# Altium PCB OPG_v8_pcb.PcbDoc (part 1 of 3)
Units mm, origin at the board's own origin, x right, y up, seen from the top; angles counter-clockwise.
Board outline 65 x 95 mm, 2 copper layers (Top Layer, Bottom Layer), stack 0.081 mm thick; 16 components, 17 nets, 129 pads, 66 vias.
Unrouted connection lines stored in the file: 30.
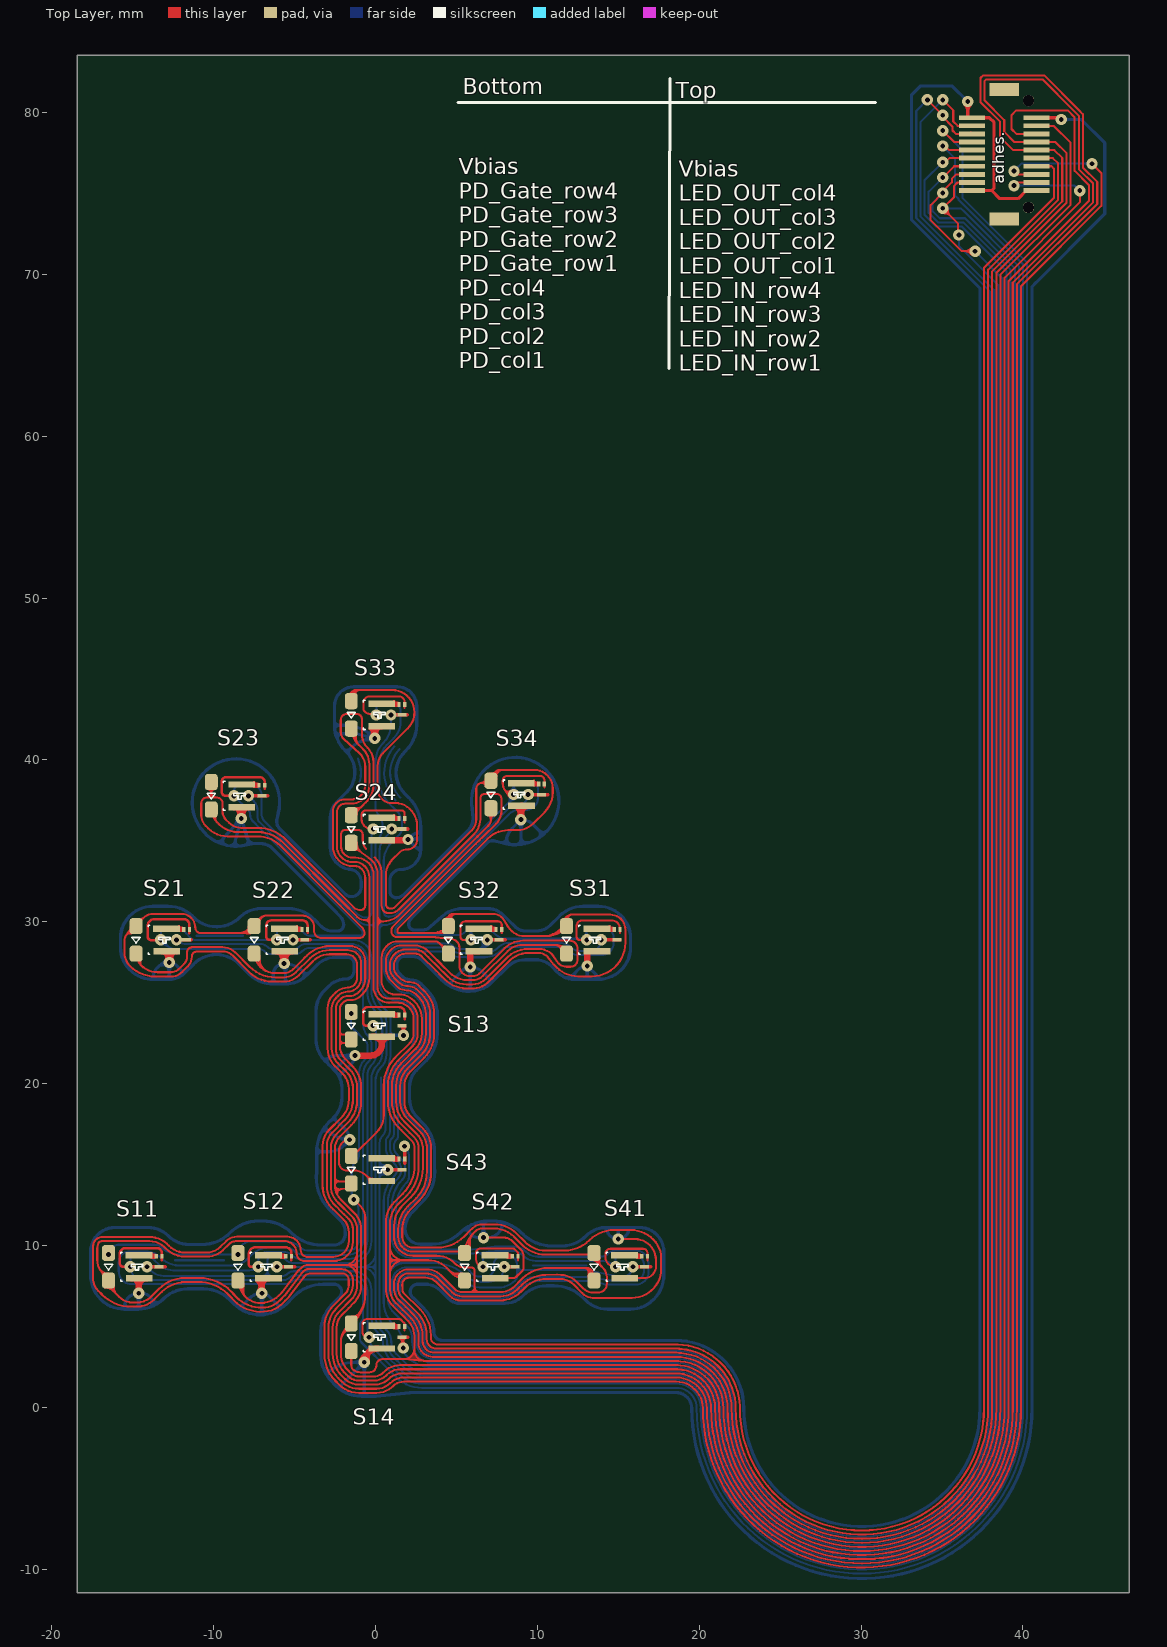
[diagram p0: Top Layer view]
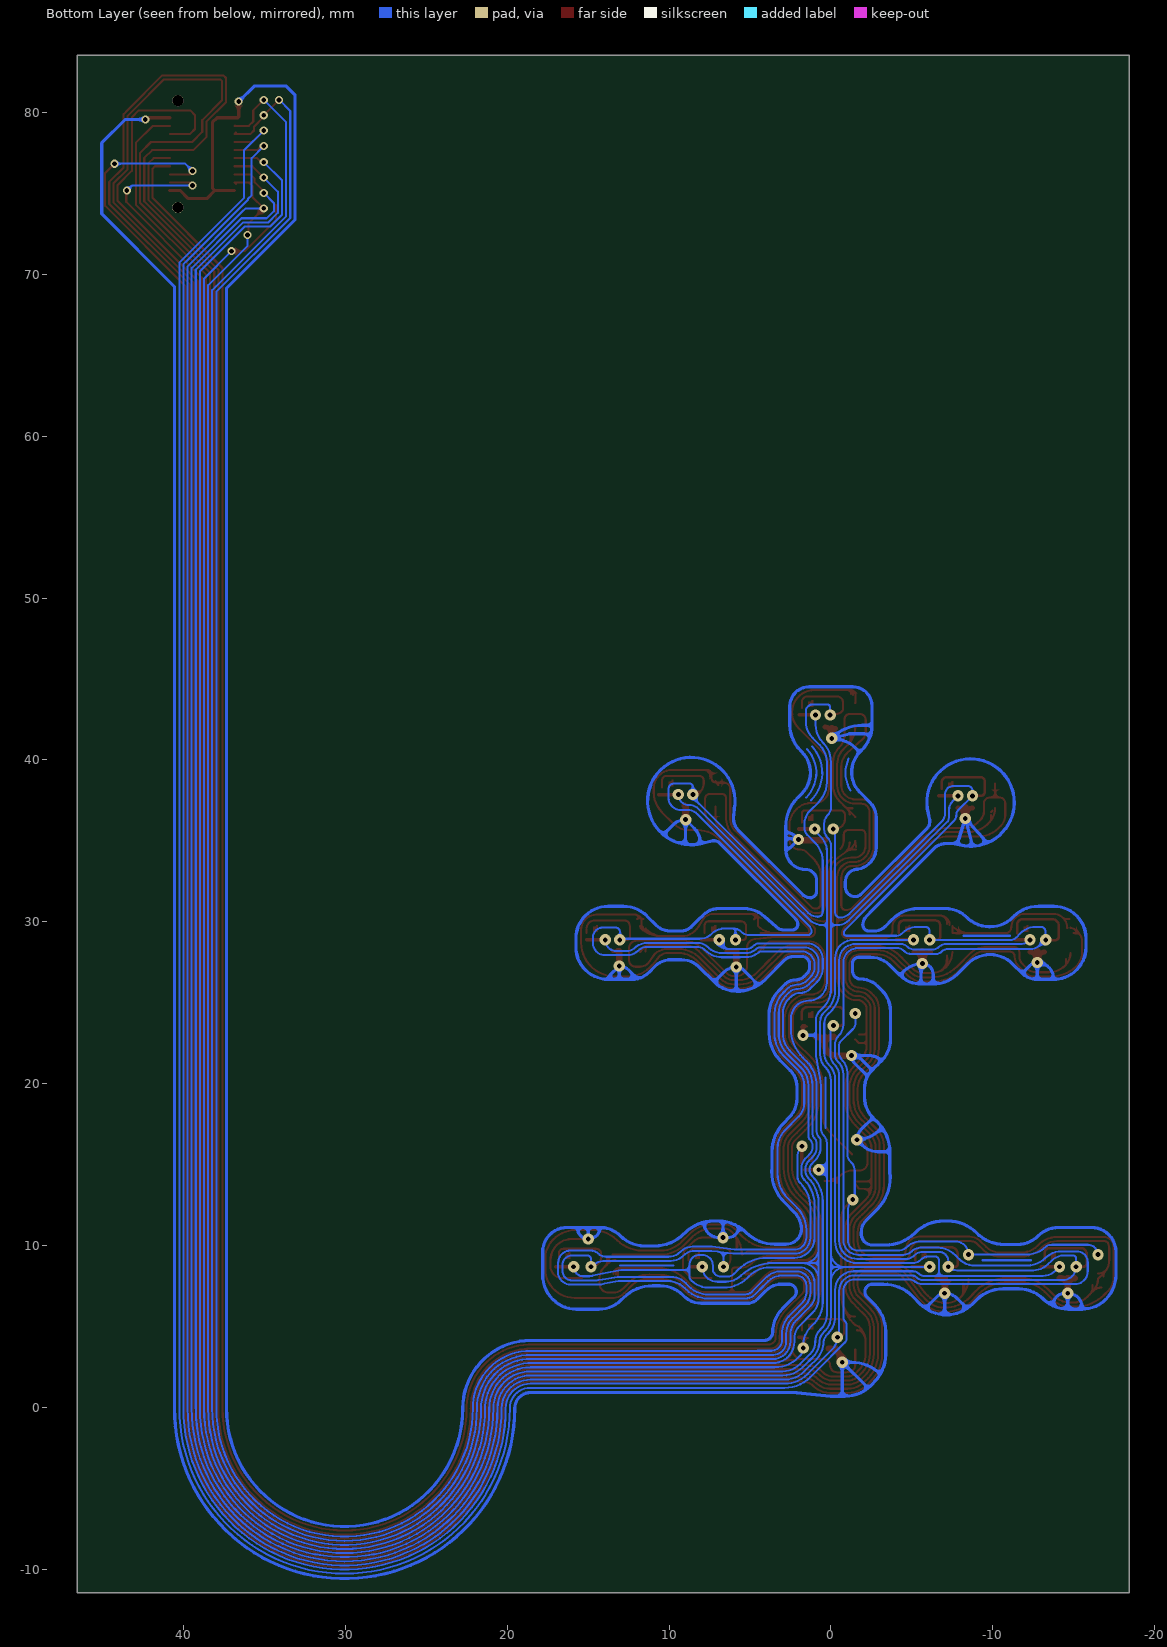
[diagram p1: Bottom Layer view, seen from below]
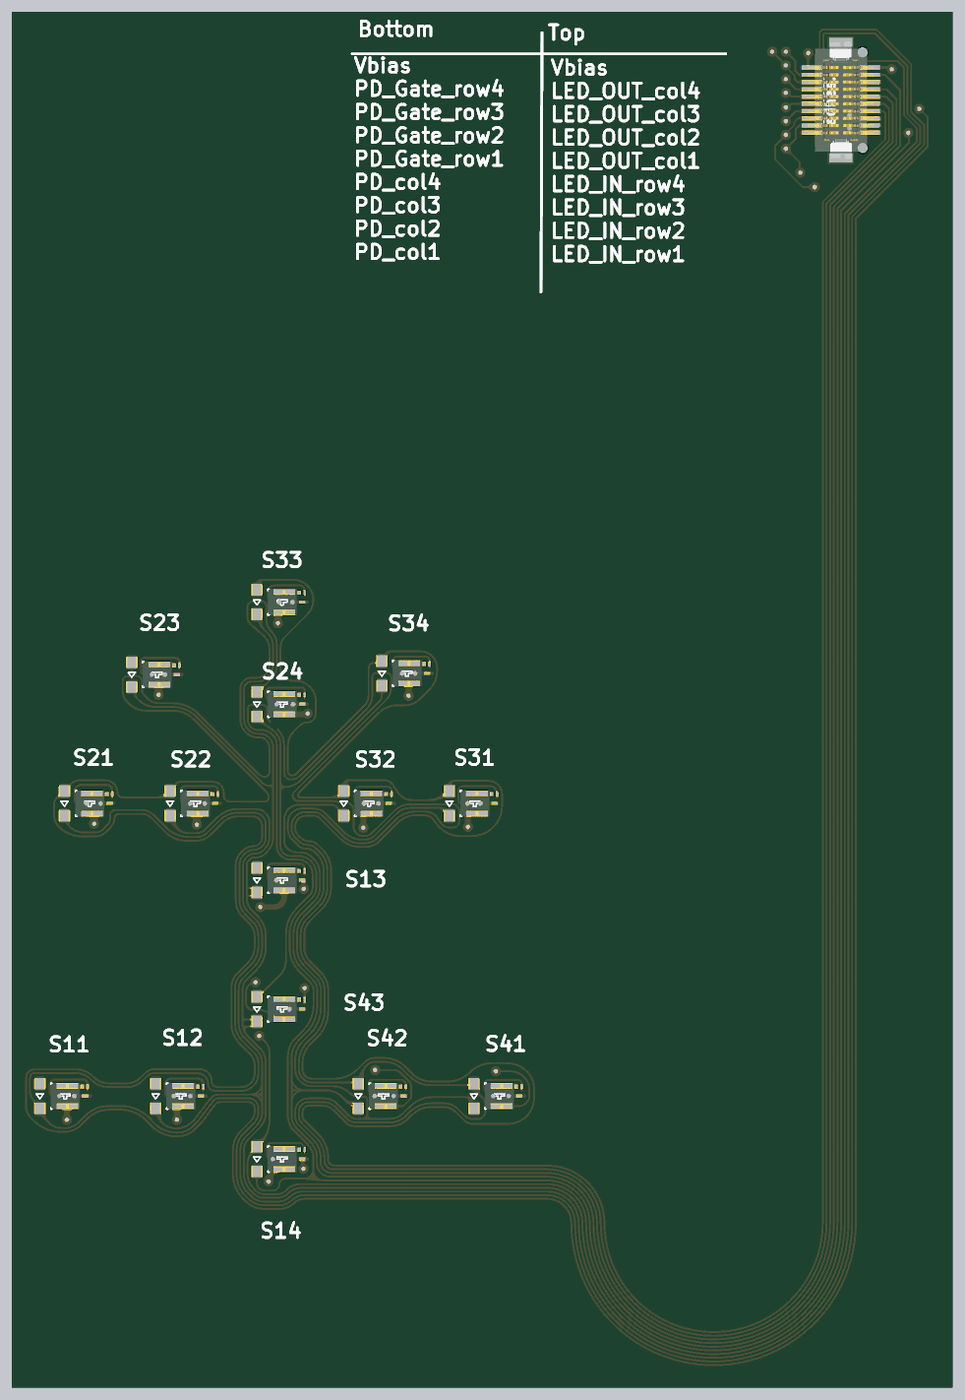
[diagram p4: 3D render of the assembled board from above, using the file's embedded part models]

## Layer stack, top to bottom
Top Solder: solder mask 0.013, Solder Resist, Dk 3.5
Top Layer: signal copper 0.028
Dielectric 1: core 0.025, Core-043, Dk 4.3
Bottom Layer: signal copper 0.028
Bottom Solder: solder mask 0.013, Solder Resist, Dk 3.5

## Board outline
-18.43,-11.46 -18.43,83.54 46.57,83.54 46.57,-11.46

## Design rules (kind name [scope] priority, off if disabled: settings)
Clearance "Aisler Clearance" [All] p1: gap=0.15 ignorepadtopadclearanceinfootprint=FALSE except(0: Arc-Hole Track-Hole SMDPad-Hole THPad-Hole Via-Hole Fill-Hole Poly-Hole Region-Hole Text-Hole; 0.1: Via-Via; 0.127: Arc-Arc Arc-Track Track-Track; 0.2: Arc-Text Track-Text SMDPad-THPad SMDPad-Text THPad-THPad THPad-Via THPad-Text Text-Text) // Aisler PCB constraints
Clearance [All] p2: gap=0.2 ignorepadtopadclearanceinfootprint=FALSE except(0: Arc-Hole Track-Hole SMDPad-Hole THPad-Hole Via-Hole Fill-Hole Poly-Hole Region-Hole Text-Hole; 0.1: SMDPad-SMDPad; 1: Arc-Fill Arc-Poly Arc-Region Track-Fill Track-Poly Track-Region SMDPad-Fill SMDPad-Poly SMDPad-Region THPad-Fill THPad-Poly THPad-Region Via-Fill Via-Poly Via-Region Fill-Fill Fill-Poly Fill-Region Poly-Poly Poly-Region Region-Region)
MinimumSolderMaskSliver [All] p1: minsoldermaskwidth=0.1
NetAntennae [All] p1: netantennaetolerance=0.3
PolygonConnect [All] p1: connectstyle=Relief reliefconductorwidth=0.254 reliefentries=4 polygonreliefangle="90 Angle" airgapwidth=0.254
RoutingVias [All] p1: holewidth=1.5 width=2.5 viastyle="Through Hole" minholewidth=0.2 minwidth=0.4 maxholewidth=2 maxwidth=3
SilkToSolderMaskClearance [IsPad] p1: minsilkscreentomaskgap=0.2 clearancetoexposedcopper=TRUE
SolderMaskExpansion [All] p1: expansion=0.102 istentingtop=FALSE
Width "Aisler Width" [All] p1: maxlimit=1 minlimit=0.127 preferedwidth=0.152 minimp=50.000000 maximp=50.000000 favimp=50.000000 // Aisler PCB Constraints
Width [All] p2: maxlimit=1 minlimit=0.1 preferedwidth=0.5 minimp=50.000000 maximp=50.000000 favimp=50.000000
27 further rules are at their usual default settings.

## Components (designator, comment, footprint, x,y, rotation, side; value= is the part's Value field where it differs from the comment)
OPT11 "OPG_Sensor_v3" OPG_SENSOR_3 -15,8.68 r0 top
OPT12 "OPG_Sensor_v3" OPG_SENSOR_3 -7,8.68 r0 top
OPT13 "OPG_Sensor_v3" OPG_SENSOR_3 0,23.58 r0 top
OPT14 "OPG_Sensor_v3" OPG_SENSOR_3 0,4.33 r0 top
OPT21 "OPG_Sensor_v3" OPG_SENSOR_3 -13.3,28.88 r0 top
OPT22 "OPG_Sensor_v3" OPG_SENSOR_3 -6,28.88 r0 top
OPT23 "OPG_Sensor_v3" OPG_SENSOR_3 -8.65,37.78 r0 top
OPT24 "OPG_Sensor_v3" OPG_SENSOR_3 0,35.73 r0 top
OPT31 "OPG_Sensor_v3" OPG_SENSOR_3 13.3,28.88 r0 top
OPT32 "OPG_Sensor_v3" OPG_SENSOR_3 6,28.88 r0 top
OPT33 "OPG_Sensor_v3" OPG_SENSOR_3 0,42.78 r0 top
OPT34 "OPG_Sensor_v3" OPG_SENSOR_3 8.63,37.86 r0 top
OPT41 "OPG_Sensor_v3" OPG_SENSOR_3 15,8.68 r0 top
OPT42 "OPG_Sensor_v3" OPG_SENSOR_3 7,8.68 r0 top
OPT43 "OPG_Sensor_v3" OPG_SENSOR_3 0,14.68 r0 top
P1 "AMPHENOL_10132797-021100LF_Bergstak_plug" AMPHENOL_10132797-021100LF_Bergstak_plug 38.85,77.434 r270 top

## Footprints (in the part's own frame and the unit in brackets; to place one, negate y for a bottom-side part, rotate by r counter-clockwise, add the part's x,y. Pads: shape width x height; smd on the part's side, far side on the other; paste and mask are expansions set on the pad)
AMPHENOL_10132797-021100LF_Bergstak_plug [mm] "plug/male, 0.5 mm pitch, 20 pin, 3 mm mated height"
  rect 0.8x1.8 smd paste-0.1 mask-0.1: 0(-4,0) 0(4,0)
  round 0.7 hole 0.7 unplated: 0(-3.3,1.5) 0(3.3,1.5)
  rect 0.3x1.6 smd paste-0.1 mask-0.1: 1(-2.25,-2) 2(-1.75,-2) 3(-1.25,-2) 4(-0.75,-2) 5(-0.25,-2) 6(0.25,-2) 7(0.75,-2) 8(1.25,-2) 9(1.75,-2) 10(2.25,-2) 11(2.25,2) 12(1.75,2) 13(1.25,2) 14(0.75,2) 15(0.25,2) 16(-0.25,2) 17(-0.75,2) 18(-1.25,2) 19(-1.75,2) 20(-2.25,2)
  body extent -4.05,-2.3 4.05,2.3, height 2.7
OPG_SENSOR_3 [mm]
  rect 1.65x0.4 smd paste-0.3 mask-0.1: A(0.39,-0.7) S(0.38,0.7)
  rect 0.55x0.22 smd paste-0.05 mask-0.05: D(1.625,0)
  rect 0.2x0.3 smd paste-0.025 mask+0.05: G(1.8,0.65) S(1.45,0.65)
  rrect50% 0.8x1 smd paste-0.1 mask-0.1: S1(-1.5,0.85) S2(-1.5,-0.85)
  Top Layer region: 1.4,0.8 1.3,0.8 1.262,0.808 1.229,0.829 1.208,0.862 1.2,0.9 1.2,0.9 1.1,0.9 1.1,0.5 1.4,0.5
  silkscreen extent -1.75,-0.9 0.6,0.9, body extent -1.9,-0.9 1.93,0.9, height 0.6

## Part data
P1: "20 pin, 0.5 mm pitch, 3 mm mated height, plug/male"

## Via types
v1: diameter 0.7, hole 0.3, Top Layer to Bottom Layer, 49 vias
v2: diameter 0.7/0.5 (per signal layer), hole 0.3, Top Layer to Bottom Layer, 17 vias

## Nets (pads, with @x,y where several pads share a name; then routed paths per layer and width w, separated by ;. In a path a pad name is that pad's centre, name@x,y a point inside that pad or via, vN(x,y) a via of type N, cw(c..) or ccw(c..) an arc to the next point about the centre after c; other vN are vias at no path point)
LED_IN_row1: OPT11.S1 OPT12.S1 OPT13.S1 OPT14.S1 P1.12 | length 182
  Top Layer w0.127: -2.146,4.031 -2.146,3.309 ccw(c-0.743,3.309) -1.735,2.317 -1.53,2.111 ccw(c-1.034,2.607) -1.034,1.906 -0.091,1.906 ccw(c-0.091,2.719) -0.01,1.91 ccw(c-0.091,2.719) 0.484,2.144 ; -1.931,4.64 cw(c-1.646,4.354) -1.888,4.678 ; OPT14.S1@-1.788,4.777 -1.872,4.694 ccw(c-1.209,4.032) -1.888,4.678 ; OPT14.S1@-1.596,4.758 -1.646,4.758 ccw(c-1.646,4.354) -1.888,4.678 ; OPT14.S1@-1.483,5.608 -1.479,5.608 ccw(c-1.479,6.299) -1.045,5.761 ; v1(-1.343,12.83) -0.921,12.408 cw(c-1.613,11.717) -0.635,11.717 -0.635,6.997 ; OPT14.S1@-1.211,5.572 ccw(c-2.602,6.963) -1.045,5.761 ; -0.99,5.81 cw(c-1.479,6.299) -1.045,5.761 ; 0.484,2.144 0.54,2.2 cw(c1.51,1.229) 1.51,2.602 4.586,2.602 17.551,2.601 18.699,2.601 18.832,2.588 cw(c18.566,-0.072) 21.239,-0.072 ccw(c30.053,-0.072) 38.867,-0.072 38.867,69.802 43.543,74.477 43.543,75.147 v2(43.511,75.179) ; v2@39.602,75.484 v2(39.447,75.484) cw(c39.647,75.484) 39.647,75.684 39.802,75.684 P1.12@40.85,75.684 ; -1.888,4.678 ccw(c-1.209,4.032) -2.146,4.032 cw(c-0.833,4.032) -1.734,4.987 -1.71,4.996 -1.5,5.08 -1.379,5.201 ccw(c-3.175,6.997) -0.651,6.711 ; -1.045,5.761 ccw(c-2.602,6.963) -0.651,6.711 ; -0.651,6.711 ccw(c-2.602,6.963) -0.635,6.963 ; -0.651,6.711 ccw(c-3.175,6.997) -0.635,6.963 ; -0.635,6.963 ccw(c-3.175,6.997) -0.635,6.997 ; -0.635,6.963 -0.635,6.997
  Bottom Layer w0.127: v1(-16.5,9.43) ccw(c-16.595,9.514) -16.468,9.505 cw(c-15.897,9.467) -15.897,10.04 -13.65,10.04 cw(c-13.65,9.326) -13.377,9.986 cw(c-13.468,9.765) -13.3,9.935 ccw(c-13.211,10.025) -13.298,9.933 ccw(c-12.033,11.273) -12.052,9.43 v1(-8.5,9.43) cw(c-7.675,9.43) -7.675,10.255 -5.587,10.255 cw(c-5.587,8.948) -4.784,9.979 cw(c-5.587,8.948) -4.663,9.872 ccw(c-4.068,10.666) -4.068,9.674 -1.68,9.674 ccw(c-1.68,10.31) -1.044,10.31 -1.044,12.108 ccw(c-2.065,12.108) v1(-1.343,12.83) cw(c-1.037,13.136) -1.47,13.136 -1.47,14.61 cw(c-0.722,14.61) -1.251,15.139 -1.165,15.225 ccw(c-1.525,15.585) -1.016,15.585 -1.016,20.702 cw(c-0.021,20.702) -0.725,21.405 ccw(c-1.267,21.948) -0.5,21.948 ccw(c-0.928,21.948) -0.501,21.974 ; v1(-1.5,24.33) ccw(c-1.476,24.306) -1.51,24.306 -1.51,23.73 ccw(c-1.003,23.73) -1.362,23.372 -0.597,22.607 cw(c-0.829,22.376) -0.501,22.376 -0.501,21.995 ; v2(39.447,75.484) 43.193,75.484 43.498,75.179 v2(43.511,75.179)
LED_IN_row2: OPT21.S1 OPT22.S1 OPT23.S1 OPT24.S1 P1.13 | length 299.4
  Top Layer w0.127: -15.338,29.26 ccw(c-14.898,28.82) -15.52,28.82 -15.52,28.09 ccw(c-14.362,28.09) -15.181,27.271 ; -15.181,27.271 ccw(c-13.586,28.864) -13.586,26.61 -12.662,26.61 ccw(c-12.662,27.634) -11.939,26.91 -11.597,27.251 ccw(c-12.191,27.844) -11.351,27.844 ccw(c-11.469,27.868) -11.349,27.86 cw(c-11.03,27.84) -11.03,28.16 -9.43,28.16 cw(c-9.43,27.315) -8.833,27.913 -7.808,26.888 ccw(c-6.404,28.291) -6.404,26.306 -5.67,26.306 ccw(c-5.67,27.622) -4.74,26.691 ccw(c-5.67,27.622) -4.739,26.692 -3.866,27.565 cw(c-2.84,26.54) -2.84,27.99 -1.783,27.99 cw(c-1.783,27.35) -1.143,27.35 -1.143,26.517 cw(c-1.729,26.517) -1.314,26.103 ; OPT21.S1@-14.983,29.298 -15.246,29.298 ccw(c-15.246,29.168) -15.338,29.26 -15.045,29.552 -15.017,29.561 OPT21.S1@-14.8,29.63 ; OPT21.S1@-14.729,30.166 -14.528,30.166 ccw(c-14.528,30.418) -14.35,30.24 ; OPT21.S1@-14.611,29.604 cw(c-14.574,29.604) -14.6,29.63 cw(c-13.75,29.63) -13.75,30.48 -11.98,30.48 cw(c-11.98,29.64) -11.14,29.64 ccw(c-10.8,29.64) -10.8,29.3 -8.538,29.3 ; -10.77,36.858 -10.77,36.592 ; -10.154,37.714 -10.15,37.714 -10.15,38 ; OPT23.S1@-10.15,38.53 -10.15,38.005 ; OPT22.S1@-7.337,29.793 cw(c-6.75,29.793) -6.927,30.353 cw(c-6.75,29.793) -6.75,30.38 ; OPT22.S1@-7.166,29.875 -7.166,29.964 cw(c-6.75,29.964) -6.75,30.38 ; -4.438,8.031 -5.344,6.818 -5.576,6.586 cw(c-6.999,8.007) -5.578,6.584 -5.755,6.407 cw(c-5.935,6.585) -5.757,6.405 -5.83,6.331 ccw(c-5.774,6.218) -5.857,6.314 cw(c-6.975,7.643) -6.879,5.909 cw(c-7.091,8.227) -8.559,6.42 cw(c-7.091,8.227) -8.564,6.425 ccw(c-8.655,6.336) -8.566,6.426 -9.139,6.999 ccw(c-10.932,5.211) -10.738,7.735 -11.748,7.735 ccw(c-11.748,5.678) -13.203,7.133 -13.674,6.662 cw(c-14.74,7.727) -14.431,6.252 ccw(c-14.404,6.128) -14.435,6.251 cw(c-14.63,7.045) -14.492,6.239 cw(c-14.63,7.045) -14.524,6.234 ccw(c-14.507,6.109) -14.53,6.233 -14.574,6.226 cw(c-14.616,6.476) -14.616,6.222 -14.643,6.222 ccw(c-14.642,6.095) -14.65,6.222 -14.678,6.22 -15.108,6.22 cw(c-15.108,8.76) -16.089,6.417 cw(c-15.108,8.76) -16.904,6.964 -17.14,7.2 cw(c-16.392,7.948) -17.433,7.761 cw(c-16.392,7.948) -17.45,7.948 -17.45,9.95 cw(c-16.88,9.95) -16.88,10.52 -13.977,10.52 cw(c-13.977,8.899) -12.765,9.975 ccw(c-11.763,10.977) -11.763,9.56 -10.44,9.56 ccw(c-10.44,10.77) -9.585,9.914 -9.231,10.269 cw(c-8.64,9.68) -9.229,10.271 cw(c-8.64,9.68) -9.143,10.345 cw(c-8.57,9.6) -8.57,10.54 -5.455,10.54 cw(c-5.455,9.71) -4.625,9.71 ccw(c-4.208,9.71) -4.208,9.293 -2.61,9.293 ccw(c-2.61,10.252) -1.651,10.252 -1.651,10.807 ccw(c-2.753,10.807) -1.973,11.586 ; -4.437,8.032 -4.372,8.118 cw(c-4.271,8.041) -4.361,8.131 -4.317,8.174 cw(c-4.228,8.084) -4.287,8.196 cw(c-3.952,7.537) -3.952,8.277 -2.073,8.277 cw(c-2.073,7.858) -1.654,7.858 -1.654,7.53 cw(c-2.365,7.53) -1.863,7.027 -2.593,6.297 ccw(c-1.226,4.926) -3.162,4.926 -3.162,3.275 ccw(c-0.825,3.275) -2.477,1.622 -2.25,1.395 ; -3.995,30.15 cw(c-4.466,29.679) -3.8,29.679 -3.8,29.429 ccw(c-3.374,29.429) -3.374,29.002 -0.978,29.002 ccw(c-0.978,29.3) -0.68,29.3 ccw(c-1.155,29.3) -0.819,29.636 -2.179,30.995 -5.896,34.712 ccw(c-7.3,33.301) -6.883,35.248 ccw(c-6.908,35.123) -6.89,35.249 ccw(c-7.257,32.756) -7.257,35.276 -9.139,35.276 cw(c-9.139,36.982) -10.346,35.776 -10.493,35.923 cw(c-9.824,36.592) -10.77,36.592 ; -3.995,30.15 ccw(c-4.55,29.595) -4.55,30.38 -6.75,30.38 ; -2.875,17.133 ccw(c-1.927,16.187) -3.266,16.187 -3.266,13.591 cw(c-3.389,13.558) -3.262,13.568 ccw(c-1.295,13.695) -2.852,12.486 ; -2.874,17.134 -2.121,17.886 ccw(c-3.256,19.022) -1.651,19.022 -1.651,19.687 ccw(c-2.947,19.687) -2.031,20.603 -2.496,21.069 -2.512,21.084 ; -2.851,12.485 ccw(c-1.394,13.585) -2.62,12.232 -1.974,11.586 ; -2.512,21.084 cw(c-1.43,22.169) -2.515,21.087 cw(c-1.43,22.169) -2.962,22.169 -2.962,23.245 -2.962,24.657 cw(c-1.819,24.657) -2.628,25.464 cw(c-1.819,24.657) -2.626,25.467 -2.517,25.575 cw(c-1.682,24.744) -2.514,25.579 cw(c-1.682,24.744) -2.49,25.602 ccw(c-2.578,25.693) -2.484,25.608 cw(c-2.294,25.439) -2.475,25.618 cw(c-1.718,24.863) -2.473,25.619 cw(c-1.718,24.863) -2.468,25.624 -2.466,25.626 ; -2.466,25.626 cw(c-1.729,24.888) -1.729,25.931 ccw(c-1.729,26.517) -1.315,26.103 ; -2.25,1.395 ccw(c-1.034,2.607) -1.034,0.89 0.07,0.89 ccw(c0.07,2.331) 0.672,1.022 ccw(c0.07,2.331) 1.088,1.311 cw(c1.749,0.652) 1.748,1.585 1.854,1.585 18.565,1.585 ; OPT24.S1@-1.5,36.48 -1.03,36.95 ; OPT24.S1@-1.323,37.012 -1.12,37.012 ccw(c-1.12,37.38) -0.86,37.12 ; OPT24.S1@-1.162,36.632 cw(c-0.712,36.632) -1.03,36.95 ; -0.867,33.269 ccw(c-1.275,32.86) -1.275,33.438 -1.421,33.438 cw(c-1.421,34.655) -2.638,34.655 -2.638,36.812 cw(c-1.89,36.812) -1.89,37.56 -1.505,37.56 ccw(c-1.505,38.43) -0.635,38.43 -0.635,39.56 ccw(c-1.85,39.56) -0.99,40.418 -1.969,41.292 -1.972,41.294 cw(c-1.541,41.725) -2.15,41.726 -2.15,42.48 cw(c-1.8,42.48) -1.8,42.83 -1.139,42.83 cw(c-1.139,42.541) -0.85,42.541 -0.85,41.61 ccw(c0.384,41.61) -0.489,40.738 ; -0.866,33.268 cw(c-1.425,32.71) -0.635,32.71 -0.635,31.02 cw(c-0.94,31.02) -0.94,30.715 cw(c-0.94,31.295) -1.35,30.885 -5.533,35.068 ccw(c-7.3,33.301) -7.3,35.8 -8.3,35.8 cw(c-8.3,36.85) -9.043,36.108 -9.246,36.311 cw(c-8.754,36.803) -9.45,36.803 -9.45,37.305 ccw(c-9.819,37.305) -9.819,37.674 ; -0.488,40.737 cw(c-1.361,39.865) -0.127,39.865 -0.127,38.43 ; -0.334,37.7 ccw(c-1.518,38.43) -0.127,38.43 ; 18.566,1.585 cw(c18.566,-0.072) 20.223,-0.072 ccw(c30.053,-0.072) 34.401,-8.888 ccw(c30.061,-0.077) 39.883,-0.072 39.883,67.93 39.883,69.277 44.849,74.243 44.849,76.264 v2(44.273,76.84) ; v2@39.602,76.384 v2(39.447,76.384) ccw(c39.647,76.384) 39.647,76.184 P1.13@40.85,76.184 ; -10.77,36.592 -10.77,37.332 cw(c-10.428,37.332) -10.428,37.674 ; -10.428,37.674 ccw(c-10.48,38) -10.15,38 ; -10.428,37.674 -9.819,37.674 ; -10.15,38 ccw(c-9.819,38.005) -9.819,37.674 ; -10.15,38 cw(c-9.819,38.005) -10.15,38.005 ; -10.15,38 -10.15,38.005 ; -8.538,29.3 ccw(c-8.538,30.768) -8.535,29.3 ; -8.538,29.3 -8.535,29.3 ; -8.535,29.3 ccw(c-8.538,30.768) OPT22.S1@-7.5,29.73 -7.5,29.3 -8.535,29.3 ; -1.03,36.95 -0.86,37.12 ; -0.86,37.12 -0.6,37.38 -0.529,37.452 ccw(c-1.518,38.43) -0.127,38.43
  Bottom Layer w0.127: v2(39.447,76.384) 39.903,76.84 v2(44.273,76.84)
LED_IN_row3: OPT31.S1 OPT32.S1 OPT33.S1 OPT34.S1 P1.14 | length 279.7
  Top Layer w0.127: OPT33.S1@-1.5,43.53 -1.51,43.53 -1.51,44.02 cw(c-1.21,44.02) -1.21,44.32 -1.048,44.32 ; OPT33.S1@-1.35,44.018 cw(c-1.048,44.018) -1.048,44.32 ; OPT33.S1@-1.237,44.085 cw(c-1.002,44.085) -1.002,44.32 ; 1.045,33.85 ccw(c2.038,32.859) 0.635,32.859 0.635,31.1 ccw(c0.925,31.1) 0.925,30.81 ccw(c0.925,31.232) 1.224,30.934 5.925,35.635 ccw(c5.21,36.35) 6.221,36.35 6.221,38.221 cw(c6.59,38.221) 6.59,38.59 7.01,38.59 ccw(c7.01,38.71) OPT34.S1@7.13,38.71 ; 1.046,33.851 1.457,34.262 cw(c1.96,33.759) 1.96,34.47 1.961,34.47 ccw(c1.96,35.08) 2.57,35.08 2.57,35.949 ccw(c1.203,35.95) 2.105,36.977 ccw(c1.237,36.109) 1.237,37.337 1.008,37.337 cw(c1.008,38.218) 0.385,37.595 cw(c1.008,38.218) 0.127,38.218 0.127,39.638 cw(c1.211,39.638) 0.444,40.404 1.99,41.95 ccw(c1,42.94) 2.333,42.513 ccw(c1,42.94) 2.4,42.94 ccw(c1.02,42.94) 1.02,44.32 -1.002,44.32 ; 1.438,29.641 ccw(c1.663,29.416) 1.345,29.416 ccw(c1.461,29.416) 1.461,29.3 3.462,29.3 ; 1.438,29.641 6.934,35.136 ; 2.131,18.017 cw(c2.984,18.87) 1.778,18.87 1.778,19.86 cw(c3.014,19.86) 2.14,20.734 3,21.594 ccw(c1.514,23.086) 3.006,21.6 ccw(c1.514,23.086) 3.62,23.086 3.62,24.298 ccw(c1.648,24.298) 3.043,25.692 2.711,26.024 ccw(c2.117,25.431) 2.117,26.27 cw(c2.117,27.109) 1.524,26.516 1.333,26.706 cw(c1.793,27.166) 1.143,27.166 1.143,27.32 cw(c1.852,27.32) 1.852,28.029 2.425,28.029 cw(c2.425,27.406) 2.865,27.847 3.715,26.997 ccw(c4.596,27.875) 3.718,26.994 4.092,26.62 4.274,26.437 ccw(c5.618,27.779) 5.618,25.88 6.028,25.88 ccw(c6.028,26.261) 6.055,25.881 6.076,25.882 ccw(c5.993,27.292) 6.897,26.207 ccw(c5.993,27.292) 6.99,26.293 ccw(c5.993,27.292) 6.992,26.295 7.255,26.558 ; 2.131,18.017 2.78,17.368 2.92,17.228 cw(c1.693,16) 2.922,17.226 cw(c1.693,16) 3.414,16.23 ccw(c3.54,16.247) 3.414,16.227 3.42,16.195 cw(c2.794,16.086) 3.429,16.086 3.429,14.544 cw(c0.889,14.544) 2.685,12.748 2.168,12.231 ccw(c3.416,10.983) 1.651,10.983 1.651,10.521 ccw(c2.303,10.521) 2.303,9.869 3.823,9.869 ccw(c3.823,12.202) 5.473,10.553 5.88,10.96 cw(c6.71,10.131) 6.017,11.077 ccw(c5.941,11.179) 6.028,11.086 cw(c6.576,10.504) 6.576,11.304 7.361,11.304 cw(c7.361,9.41) 8.699,10.75 ; 3.736,7.745 ccw(c3.096,7.103) 3.096,8.01 2.076,8.01 ccw(c2.076,7.585) 1.651,7.585 1.651,7.482 1.652,7.48 1.652,7.275 ccw(c2.088,7.308) 1.708,7.092 1.722,7.078 2.751,6.049 cw(c1.146,4.444) 2.752,6.048 cw(c1.146,4.444) 3.416,4.444 3.416,4.315 ccw(c3.85,4.315) 3.85,3.88 4.585,3.88 17.55,3.88 17.655,3.88 18.662,3.88 ccw(c18.687,4.005) 18.682,3.878 cw(c18.545,-0.084) 20.546,3.339 cw(c18.566,-0.072) 22.508,0.05 22.509,0.033 22.509,-0.072 ccw(c30.053,-0.072) 37.597,-0.072 37.597,70.402 ; 3.737,7.745 4.626,6.856 ; OPT32.S1@4.35,29.3 3.462,29.3 ; 4.626,6.855 ccw(c5.238,7.468) 5.238,6.602 7.708,6.602 ccw(c7.708,8.367) 8.791,6.973 ccw(c7.708,8.367) 8.956,7.119 9.203,7.365 cw(c10.56,6.007) 10.56,7.927 11.407,7.927 cw(c11.407,6.75) 12.239,7.582 12.776,7.045 ccw(c13.42,7.63) 13.42,6.76 15.855,6.76 ccw(c15.855,8.555) 17.65,8.555 17.65,9.208 ccw(c16.028,9.208) 17.175,10.355 ccw(c15.761,8.989) 15.761,10.955 14.749,10.955 ccw(c14.749,8.785) 13.215,10.319 cw(c11.68,11.854) 11.68,9.684 10.518,9.684 cw(c10.518,11.503) 9.233,10.217 8.7,10.749 ; OPT32.S1@4.667,30.192 cw(c4.965,30.192) 4.965,30.49 ; 4.714,30.351 ccw(c4.844,30.276) OPT32.S1@4.767,30.148 ; 4.996,30.49 4.965,30.49 ; OPT34.S1@6.8,38.597 OPT34.S1@6.8,38.663 ; 6.935,35.137 cw(c8.198,33.872) 8.198,35.66 8.764,35.66 ccw(c8.764,37.027) 9.73,36.06 10.444,36.774 ccw(c9.224,37.995) 10.95,37.995 10.95,38.236 ccw(c9.806,38.236) 10.615,39.045 10.598,39.062 ccw(c9.83,38.294) 10.512,39.139 cw(c10.593,39.237) 10.51,39.141 ccw(c10.18,38.76) 10.452,39.184 ccw(c9.83,38.294) 9.83,39.38 7.833,39.38 ; OPT34.S1@6.962,38.442 7.13,38.61 ccw(c7.13,38.855) 7.375,38.855 7.375,39.085 cw(c7.67,39.085) 7.67,39.38 7.833,39.38 ; 7.256,26.559 8.366,27.668 cw(c9.43,26.452) 8.369,27.671 cw(c9.43,26.452) 9.43,28.068 10.079,28.068 cw(c10.079,27.289) 10.63,27.84 cw(c10.079,27.289) 10.631,27.839 11.016,27.355 ccw(c11.115,27.435) 11.025,27.345 ; OPT34.S1@7.461,39.007 cw(c7.833,39.007) 7.833,39.38 ; 7.91,39.38 7.833,39.38 ; 11.025,27.345 11.195,27.175 ccw(c12.516,28.497) 12.516,26.628 13.358,26.628 ccw(c13.358,28.709) 15.439,28.709 15.439,29.511 ccw(c14.51,29.511) 14.51,30.44 12.105,30.44 ; OPT31.S1@11.46,29.583 11.441,29.564 cw(c10.345,30.66) 10.345,29.11 ; OPT31.S1@11.587,30.165 ccw(c11.604,30.365) 11.785,30.28 ; OPT31.S1@11.6,29.63 ccw(c11.6,29.66) 11.63,29.66 11.706,29.736 11.706,30.041 cw(c12.105,30.041) 12.105,30.44 ; OPT31.S1@11.755,29.612 cw(c10.544,30.822) 10.544,29.11 10.345,29.11 ; OPT31.S1@11.8,29.73 11.771,29.701 cw(c10.345,31.127) 10.345,29.11 ; OPT31.S1@11.867,30.197 11.867,30.202 cw(c12.105,30.202) 12.105,30.44 ; 11.942,30.376 ccw(c12.021,30.286) OPT31.S1@11.997,30.168 ; 37.594,70.399 41.917,74.722 41.917,76.539 41.772,76.684 P1.14@40.85,76.684 ; -1.048,44.32 -1.002,44.32 ; 3.462,29.3 ccw(c3.462,30.768) OPT32.S1@4.5,29.73 4.5,30.21 cw(c4.78,30.21) 4.78,30.49 4.965,30.49 ; 4.965,30.49 7.365,30.49 cw(c7.232,29.666) 7.943,30.103 8.191,29.701 ccw(c9.224,30.308) 9.224,29.11 10.345,29.11
LED_IN_row4: OPT41.S1 OPT42.S1 OPT43.S1 P1.15 | length 266.5
  Top Layer w0.127: OPT43.S1@-1.313,15.617 0.068,16.998 ccw(c-0.994,18.06) 0.508,18.06 0.508,19.86 cw(c3.014,19.86) 1.196,21.584 cw(c1.943,20.897) 1.223,21.613 cw(c1.943,20.897) 1.227,21.617 2.105,22.495 ccw(c1.514,23.086) 2.35,23.086 2.35,24.01 ccw(c1.36,24.01) 2.06,24.71 ccw(c1.36,24.01) 1.738,24.925 cw(c1.886,25.276) 1.719,24.933 ccw(c1.45,24.38) 1.463,24.995 cw(c1.475,25.376) 1.443,24.997 ccw(c1.36,24.01) 1.36,25 0.853,25 ccw(c0.854,24.873) 0.822,24.996 0.82,24.995 cw(c0.82,25.916) 0.299,25.157 cw(c0.822,25.949) -0.127,25.949 -0.127,32.919 ccw(c-1.116,32.919) -0.413,33.615 -0.417,33.618 ccw(c-1.229,32.811) -1.227,33.956 -1.431,33.956 cw(c-1.431,34.655) -2.13,34.651 cw(c-1.431,34.655) -2.13,34.655 -2.13,35.42 cw(c-1.87,35.42) -1.87,35.68 -1.09,35.68 cw(c-1.09,35.38) -0.79,35.38 -0.79,35.007 ccw(c-0.073,35.007) -0.58,34.5 ; -0.058,33.978 cw(c-1.116,32.919) 0.381,32.919 0.381,30.976 ccw(c0.822,30.976) 0.822,30.535 0.9,30.535 ccw(c0.9,31.282) 1.428,30.754 5.696,35.022 ccw(c3.9,36.818) 5.724,35.05 6.087,35.413 ccw(c5.15,36.35) 6.475,36.35 6.475,37.625 cw(c6.75,37.625) 6.75,37.9 7.48,37.9 cw(c7.48,37.6) 7.78,37.6 7.78,36.849 cw(c6.666,36.849) 7.454,36.061 6.61,35.217 6.448,35.056 cw(c5.15,36.35) 6.445,35.052 6.204,34.812 1.044,29.651 ccw(c1.209,29.485) 0.975,29.485 0.975,29.416 ccw(c1.345,29.416) 1.345,29.046 3.06,29.046 3.618,29.046 cw(c3.618,28.261) 3.702,29.042 4.651,28.94 cw(c4.651,28.411) 5.025,28.785 cw(c4.651,28.411) 5.18,28.411 5.18,27.277 ccw(c5.815,27.277) 5.815,26.642 5.993,26.642 ccw(c5.993,27.292) 6.396,26.782 6.401,26.787 7.985,28.365 cw(c9.11,27.237) 8.567,28.734 cw(c9.11,27.237) 9.11,28.83 11.992,28.83 cw(c11.992,28.323) 12.341,28.691 cw(c11.992,28.323) 12.343,28.689 cw(c11.992,28.323) 12.347,28.685 cw(c11.992,28.323) 12.35,28.681 cw(c12.2,28.53) 12.351,28.68 cw(c12.2,28.53) 12.366,28.664 12.369,28.66 ccw(c12.469,28.739) 12.371,28.658 cw(c12.005,28.355) 12.48,28.355 12.48,27.64 cw(c12.06,27.64) 12.06,27.22 11.793,27.22 cw(c11.793,27.903) 11.31,27.42 11.283,27.447 10.896,27.991 ccw(c10.793,27.917) 10.882,28.008 ccw(c10.113,27.223) 10.113,28.322 9.43,28.322 ccw(c9.43,26.452) 8.197,27.858 ccw(c8.366,27.668) 8.185,27.847 7.077,26.739 ccw(c7.256,26.559) 7.075,26.736 7.03,26.691 6.812,26.474 cw(c5.993,27.292) 5.993,26.134 5.618,26.134 cw(c5.618,27.779) 4.453,26.618 4.271,26.799 ; 3.057,13.818 ccw(c0.889,14.544) 3.175,14.544 3.175,16.086 ccw(c2.794,16.086) 3.169,16.151 3.163,16.189 cw(c3.288,16.209) 3.163,16.192 ccw(c1.693,16) 2.739,17.05 2.605,17.185 1.951,17.839 cw(c2.984,18.87) 1.524,18.87 1.524,19.86 cw(c3.014,19.86) 1.961,20.914 2.82,21.773 ccw(c1.514,23.086) 3.366,23.086 3.366,24.298 ccw(c1.648,24.298) 2.864,25.512 2.606,25.77 ccw(c2.012,25.177) 2.012,26.016 cw(c2.012,26.855) 1.418,26.262 1.154,26.527 cw(c1.793,27.166) 0.889,27.166 0.889,27.32 cw(c1.852,27.32) 1.852,28.283 2.425,28.283 cw(c2.425,27.406) 3.045,28.026 3.256,27.815 3.898,27.173 3.995,27.075 4.271,26.8 ; 3.144,14.167 cw(c0.889,14.544) 2.505,12.927 1.989,12.412 ccw(c3.416,10.983) 1.397,10.983 1.397,10.521 ccw(c2.303,10.521) 2.303,9.615 5.163,9.615 5.471,9.446 5.5,9.43 cw(c7.359,9.43) 6.044,10.744 ; OPT42.S1@5.773,9.906 5.773,10.088 cw(c6.701,10.088) 6.044,10.744 ; OPT42.S1@5.834,9.833 5.834,10.236 cw(c6.553,10.236) 6.044,10.744 ; OPT41.S1@13.325,9.098 cw(c13.325,8.525) 13.73,8.93 13.873,8.787 cw(c14.292,9.206) OPT41.S1@13.7,9.206 ; OPT41.S1@13.5,9.43 10.518,9.43 cw(c10.518,11.503) 9.124,9.97 ccw(c9.038,9.876) 9.109,9.981 8.558,10.532 ccw(c7.308,9.283) 7.308,11.05 6.576,11.05 ccw(c6.576,10.504) 6.19,10.89 6.044,10.744 ; OPT41.S1@13.838,9.294 13.838,8.955 ccw(c14.159,8.955) 13.932,8.728 ; 13.873,8.787 13.932,8.728 ; P1.15@40.85,77.184 41.852,77.184 42.177,76.859 42.177,74.623 37.851,70.297 37.851,67.928 37.851,-0.072 cw(c30.053,-0.072) 22.255,-0.072 ccw(c18.566,-0.072) 18.933,3.599 18.801,3.612 ccw(c18.699,2.601) 18.759,3.616 18.602,3.625 ccw(c18.557,2.864) 18.557,3.626 17.55,3.626 4.585,3.626 3.745,3.626 cw(c3.745,4.209) 3.162,4.209 3.162,4.42 ccw(c1.142,4.42) 2.571,5.847 1.601,6.818 cw(c2.088,7.308) 1.398,7.266 1.398,7.375 1.397,7.376 1.397,7.623 cw(c2.038,7.623) 2.038,8.264 3.098,8.264 cw(c3.098,7.108) 3.915,7.925 4.74,7.1 ccw(c5.33,7.69) 5.33,6.856 7.708,6.856 ccw(c7.708,8.356) 8.643,7.183 ccw(c7.708,8.356) 8.77,7.296 8.834,7.36 cw(c8.924,7.27) 8.853,7.376 9.028,7.549 cw(c10.56,6.007) 9.2,7.703 9.21,7.711 cw(c10.545,6.047) 10.512,8.18 11.218,8.192 11.475,8.179 cw(c11.407,6.75) 12.417,7.763 cw(c11.407,6.75) 12.418,7.762 12.843,7.337 ccw(c13.44,7.934) 13.44,7.09 13.762,7.09 ccw(c13.762,7.618) 14.29,7.618 14.29,8.049 ccw(c13.516,8.049) 14.064,8.596 13.932,8.728
LED_OUT_col1: OPT11.S2 OPT21.S2 OPT31.S2 OPT41.S2 P1.16 | length 425.8
  Top Layer w0.127: -17.02,8.5 -16.996,8.476 ; OPT11.S2@-16.834,8.085 ccw(c-17.387,8.085) -16.885,8.317 ; OPT11.S2@-16.703,7.393 cw(c-16.703,6.694) -16.208,7.188 -16.182,7.162 cw(c-15.414,7.93) -16.5,7.93 -16.848,8.278 cw(c-16.008,9.118) -16.885,8.317 ; OPT11.S2@-16.508,8.252 cw(c-16.508,8.887) -16.958,8.438 -16.996,8.476 ; -16.182,7.162 -16.001,6.981 ; OPT11.S2@-16.168,7.537 -16.168,7.383 ccw(c-15.599,7.383) -16.001,6.981 ; OPT21.S2@-14.8,28.073 ccw(c-13.707,28.073) -14.48,27.3 ; OPT21.S2@-14.536,27.705 -14.536,27.436 ccw(c-14.344,27.436) -14.48,27.3 ; -12.152,27.078 cw(c-12.63,27.556) -12.63,26.88 -13.466,26.88 cw(c-13.466,28.314) -14.48,27.3 ; -12.134,27.093 -11.831,27.396 ccw(c-12.269,27.834) -11.65,27.834 -11.65,28.09 cw(c-11.31,28.09) -11.31,28.43 -9.469,28.43 cw(c-9.469,27.271) -8.673,28.113 -7.79,27.23 ccw(c-6.171,28.852) -6.171,26.56 -5.67,26.56 ccw(c-5.67,27.622) -4.919,26.871 -4.046,27.744 cw(c-2.84,26.54) -4.044,27.746 cw(c-2.84,26.54) -2.84,28.244 -1.693,28.244 cw(c-1.693,27.44) -0.889,27.44 -0.889,26.517 cw(c-1.729,26.517) -1.135,25.923 -1.142,25.916 ; -9.05,10.09 -9.442,9.698 ccw(c-9.368,9.595) -9.454,9.689 cw(c-10.44,10.77) -10.44,9.306 -11.763,9.306 cw(c-11.763,10.977) -12.946,9.796 -13.029,9.88 ccw(c-13.961,8.948) -13.034,9.885 ccw(c-13.961,8.948) -13.17,10.002 ccw(c-13.977,8.899) -13.211,10.031 ccw(c-13.977,8.899) -13.979,10.266 -16.88,10.266 ccw(c-16.88,9.95) -17.095,10.181 ccw(c-17.008,10.089) -17.121,10.146 ccw(c-16.512,9.836) -17.196,9.836 -17.196,9.118 ccw(c-16.008,9.118) -16.885,8.317 ; -9.049,10.091 cw(c-8.64,9.68) -8.64,10.26 -5.543,10.26 cw(c-5.63,9.51) -4.875,9.51 ; -4.875,9.51 ccw(c-4.404,9.51) -4.404,9.039 -2.572,9.039 ccw(c-2.572,10.213) -1.397,10.213 -1.397,11 ccw(c-2.287,11) -1.565,11.52 ccw(c-2.287,11) -1.656,11.627 ccw(c-1.745,11.537) -1.657,11.629 -1.79,11.761 -1.933,11.905 -1.955,11.927 -2.117,12.088 -2.437,12.408 -2.442,12.413 -2.498,12.47 -2.5,12.472 ccw(c-2.591,12.383) -2.502,12.474 ccw(c-2.593,12.385) -2.503,12.475 -2.508,12.48 cw(c-1.295,13.695) -2.907,13.105 cw(c-1.295,13.695) -3.012,13.695 cw(c-1.295,13.695) -3.012,13.696 -3.012,13.698 -3.012,13.797 -3.012,13.9 ; -3.012,13.901 -3.012,16.166 cw(c-1.876,16.166) -2.68,16.969 ; -2.708,22.697 -2.708,22.169 ccw(c-1.43,22.169) -2.335,21.266 ccw(c-1.43,22.169) -2.333,21.264 ; -2.708,22.698 -2.708,22.774 -2.708,23.14 -2.708,24.657 cw(c-1.819,24.657) -2.448,25.285 cw(c-1.819,24.657) -2.447,25.287 -2.337,25.396 cw(c-1.682,24.744) -2.335,25.399 cw(c-1.682,24.744) -2.307,25.425 ccw(c-2.394,25.517) -2.294,25.439 cw(c-1.718,24.863) -1.718,25.677 ccw(c-1.718,26.492) -1.143,25.916 ; -2.679,16.969 -1.923,17.725 ; -2.332,21.264 -1.814,20.745 ; -2.07,1.574 ccw(c-1.034,2.607) -2.067,1.571 ccw(c-1.034,2.607) -1.034,1.144 0.07,1.144 ccw(c0.07,2.331) 0.909,1.491 ; -2.071,1.575 -2.298,1.802 cw(c-0.825,3.275) -2.908,3.275 -2.908,4.926 cw(c-1.227,4.926) -2.417,6.113 -1.682,6.848 ccw(c-2.366,7.53) -1.4,7.53 -1.4,7.858 ccw(c-2.073,7.858) -2.073,8.531 -4.175,8.531 ccw(c-4.175,8.18) -4.423,8.427 -4.558,8.293 -5.602,6.919 -5.935,6.585 cw(c-6.975,7.643) -7.002,6.16 cw(c-7.081,8.254) -8.437,6.657 -8.441,6.66 -8.713,6.932 -8.718,6.937 ccw(c-10.913,5.175) -10.076,7.862 ccw(c-10.932,5.211) -10.59,7.976 ccw(c-10.932,5.211) -10.719,7.989 ccw(c-10.738,7.735) -10.736,7.989 ccw(c-10.738,7.735) -10.738,7.989 -11.748,7.989 ccw(c-11.748,5.678) -13.381,7.314 ccw(c-11.748,5.678) -13.383,7.312 -13.854,6.841 cw(c-14.74,7.727) -14.487,6.5 ccw(c-14.461,6.376) -14.493,6.498 cw(c-14.63,7.045) -14.562,6.486 ccw(c-14.545,6.36) -14.568,6.485 -14.616,6.476 -15.038,6.476 cw(c-15.038,7.582) -15.82,6.8 -16.001,6.981 ; -1.923,17.726 ccw(c-3.193,18.995) -1.397,18.995 -1.397,19.739 ccw(c-2.82,19.739) -1.813,20.745 ; 0.91,1.492 cw(c1.749,0.652) 1.749,1.839 18.565,1.839 ; 0.974,26.347 1.313,26.008 ccw(c1.907,26.601) 1.907,25.762 cw(c1.907,24.923) 2.5,25.517 2.684,25.333 cw(c1.648,24.298) 3.112,24.298 3.112,23.086 cw(c1.514,23.086) 2.646,21.958 cw(c1.514,23.086) 2.642,21.954 1.765,21.077 ccw(c1.943,20.897) 1.763,21.075 ccw(c1.943,20.897) 1.758,21.07 1.754,21.066 cw(c1.66,21.152) 1.753,21.064 ccw(c3.014,19.86) 1.27,19.86 1.27,18.87 ccw(c2.984,18.87) 1.771,17.659 ccw(c2.984,18.87) 1.774,17.656 ccw(c2.984,18.87) 1.775,17.655 2.095,17.334 2.561,16.869 cw(c1.693,16) 2.562,16.868 cw(c1.693,16) 2.911,16.154 ccw(c3.037,16.172) 2.912,16.15 2.919,16.108 cw(c2.794,16.086) 2.921,16.086 2.921,14.768 cw(c0.381,14.768) 2.177,12.972 1.66,12.455 ccw(c2.908,11.206) 1.143,11.206 1.143,10.521 ccw(c2.303,10.521) 2.303,9.361 3.773,9.361 cw(c3.773,7.78) 4.891,8.898 ; 0.973,26.348 cw(c1.793,27.166) 0.635,27.163 0.635,27.55 cw(c1.622,27.55) 1.622,28.537 2.425,28.537 cw(c2.425,27.406) 3.226,28.204 3.435,27.995 cw(c3.256,27.815) 3.436,27.994 4.075,27.355 ccw(c4.596,27.875) 4.076,27.354 4.573,26.857 ccw(c5.705,27.988) 5.458,26.407 cw(c5.439,26.282) 5.468,26.405 ccw(c5.618,27.05) 5.618,26.388 5.993,26.388 ccw(c5.993,27.292) 6.632,26.653 8.163,28.184 cw(c9.11,27.237) 9.11,28.576 10.98,28.576 ; 4.891,8.898 ccw(c5.539,9.546) 5.539,8.63 5.918,8.63 cw(c5.918,8.423) 6.125,8.423 6.125,7.41 ; 6.49,7.11 6.425,7.11 ; OPT31.S2@11.467,28.177 ccw(c11.068,28.177) 11.235,28.539 ; OPT31.S2@11.722,28.34 ccw(c11.153,27.771) 11.153,28.576 11.068,28.576 ; OPT31.S2@11.8,28.13 11.618,28.312 ccw(c10.98,27.673) 11.235,28.539 ; OPT41.S2@13.171,8.064 13.171,8.344 ccw(c12.905,8.344) 12.905,8.61 ; OPT41.S2@13.295,8.22 ccw(c12.905,8.22) 12.905,8.61 ; OPT41.S2@13.436,8.223 ccw(c13.049,8.223) 13.049,8.61 12.905,8.61 ; 18.566,1.839 cw(c18.566,-0.072) 20.477,-0.072 ccw(c30.053,-0.072) 39.629,-0.072 39.629,69.383 44.595,74.349 44.595,75.721 43.709,76.607 43.709,79.905 43.487,80.127 43.487,80.129 41.315,82.302 37.62,82.302 37.618,82.3 37.544,82.3 37.383,82.139 37.383,80.639 38.593,79.429 38.593,78.704 38.597,78.7 38.597,78.484 39.397,77.684 P1.16@40.85,77.684 41.948,77.684 42.431,77.201 42.431,74.517 38.105,70.191 38.105,-0.072 cw(c30.053,-0.072) 22.001,-0.072 ccw(c18.566,-0.072) 18.908,3.346 18.776,3.36 ccw(c18.699,2.601) 18.744,3.362 18.587,3.371 ccw(c18.557,2.864) 18.557,3.372 17.55,3.372 4.655,3.372 3.64,3.372 cw(c3.64,4.104) 2.908,4.104 2.908,4.42 ccw(c1.142,4.42) 2.391,5.669 1.854,6.206 1.421,6.639 cw(c2.088,7.308) 1.144,7.259 ccw(c1.017,7.252) 1.143,7.271 1.143,7.624 cw(c2.037,7.624) 2.037,8.518 3.147,8.518 cw(c3.147,7.227) 4.059,8.141 4.91,7.29 ccw(c5.345,7.725) 5.345,7.11 5.825,7.11 ; -16.996,8.476 cw(c-17.387,8.085) -16.885,8.317 ; 5.825,7.11 ccw(c5.825,7.41) 6.125,7.41 ; 5.825,7.11 6.12,7.11 ; 6.12,7.11 6.425,7.11 ; 6.12,7.11 6.125,7.115 6.125,7.41 ; 6.125,7.41 ccw(c6.425,7.41) 6.425,7.11 ; 6.425,7.11 7.708,7.11 ccw(c7.708,8.356) 8.589,7.475 8.955,7.84 8.959,7.84 9.079,7.96 cw(c10.648,6.391) 10.648,8.61 12.905,8.61 ; 10.98,28.576 cw(c10.98,27.673) 11.235,28.539 ; 10.98,28.576 11.068,28.576 ; 11.068,28.576 cw(c11.068,28.177) 11.235,28.539
LED_OUT_col2: OPT12.S2 OPT22.S2 OPT32.S2 OPT42.S2 P1.17 | length 374.9
  Top Layer w0.127: OPT12.S2@-8.5,7.93 ccw(c-6.955,7.93) -8.047,6.837 ; OPT12.S2@-8.237,7.573 -8.237,7.295 ccw(c-7.59,7.295) -8.047,6.837 ; OPT12.S2@-8.162,7.66 -8.162,7.114 ccw(c-7.771,7.114) -8.047,6.837 ; OPT22.S2@-7.5,28.13 ccw(c-6.2,28.13) -6.612,26.897 ; OPT22.S2@-7.206,27.773 ccw(c-6.263,27.773) -7.165,27.499 ; OPT22.S2@-7.165,27.901 -7.165,27.499 ; -7.07,27.26 cw(c-7.07,27.355) -7.165,27.355 -7.165,27.499 ; -2.43,16.859 ccw(c-1.637,16.067) -2.758,16.067 -2.758,13.9 -2.758,13.74 -2.758,13.695 ccw(c-1.295,13.695) -2.329,12.659 -2.324,12.655 -2.32,12.651 ; -2.43,16.86 -1.72,17.569 ccw(c-3.113,18.962) -1.143,18.962 -1.143,19.778 ccw(c-2.725,19.778) -1.606,20.897 -2.154,21.445 cw(c-1.43,22.169) -2.454,22.169 -2.454,22.593 -2.454,24.657 cw(c-1.819,24.657) -2.268,25.106 cw(c-1.819,24.657) -2.267,25.107 -2.157,25.217 cw(c-1.682,24.744) -2.155,25.219 cw(c-1.682,24.744) -1.682,25.414 -1.623,25.414 ccw(c-1.623,26.229) -1.047,25.652 -0.956,25.743 ccw(c-1.729,26.517) -0.635,26.517 -0.635,27.56 ccw(c-1.573,27.56) -1.573,28.498 -2.84,28.498 ccw(c-2.84,26.54) -4.226,27.923 -4.235,27.914 cw(c-4.324,28.004) -4.242,27.907 ccw(c-2.614,25.958) -4.41,27.754 -5.091,27.073 cw(c-5.678,27.66) -5.678,26.83 -6.2,26.83 ; -2.32,12.65 -1.478,11.809 ; -1.518,6.632 -2.251,5.899 ccw(c-1.278,4.926) -2.252,5.898 ccw(c-1.278,4.926) -2.654,4.926 -2.654,3.309 ccw(c-0.743,3.309) -2.094,1.958 -1.891,1.755 ccw(c-1.034,2.607) -1.89,1.754 ccw(c-1.034,2.607) -1.888,1.751 ccw(c-1.034,2.607) -1.034,1.398 -0.035,1.398 ccw(c-0.035,2.585) 0.804,1.745 ; -1.518,6.632 ccw(c-2.416,7.535) -1.15,7.401 ccw(c-2.608,7.54) -1.143,7.54 -1.143,7.57 -1.143,8.049 ; -1.477,11.808 cw(c-2.287,11) -1.143,11 -1.143,9.56 ; 0.805,1.746 cw(c1.644,0.906) 1.644,2.093 18.566,2.093 cw(c18.566,-0.072) 20.731,-0.072 ccw(c30.053,-0.072) 39.375,-0.072 39.375,69.488 44.341,74.454 44.341,75.616 43.455,76.502 43.455,79.8 43.117,80.138 43.117,80.14 41.209,82.048 37.725,82.048 37.637,81.96 37.637,80.744 38.847,79.534 38.847,78.809 39.472,78.184 P1.17@40.85,78.184 42.012,78.184 42.685,77.511 42.685,74.412 38.359,70.086 38.359,-0.072 cw(c30.053,-0.072) 21.747,-0.072 ccw(c18.566,-0.072) 18.883,3.094 18.75,3.107 ccw(c18.699,2.601) 18.729,3.109 18.572,3.118 ccw(c18.557,2.864) 18.557,3.118 18.179,3.118 17.55,3.118 4.585,3.118 3.535,3.118 cw(c3.535,3.999) 2.654,3.999 2.654,4.406 ccw(c1.109,4.406) 2.201,5.499 1.749,5.952 1.676,6.024 1.242,6.459 cw(c2.088,7.308) 0.891,7.237 ccw(c0.764,7.228) 0.891,7.242 cw(c1.143,7.271) 0.889,7.269 cw(c1.143,7.271) 0.889,7.273 0.889,8.222 ; 0.889,10.01 0.889,9.944 ; 1.195,25.508 cw(c1.198,26.328) 0.381,26.259 cw(c0.508,26.268) 0.381,26.267 0.381,27.778 cw(c1.394,27.778) 1.394,28.791 2.109,28.791 2.11,28.792 3.618,28.792 cw(c3.618,28.261) 3.994,28.636 4.018,28.612 ; 1.196,25.508 1.434,25.508 cw(c1.434,24.189) 2.366,25.122 ; 2.367,25.122 2.37,25.119 ; 2.37,25.118 cw(c1.191,23.94) 2.394,25.094 ccw(c2.485,25.183) 2.396,25.092 cw(c1.36,24.01) 2.418,25.071 cw(c1.36,24.01) 2.421,25.068 cw(c1.36,24.01) 2.858,24.01 2.858,23.086 cw(c1.514,23.086) 2.466,22.137 cw(c1.514,23.086) 2.463,22.134 1.586,21.257 ccw(c1.943,20.897) 1.583,21.254 ccw(c1.943,20.897) 1.573,21.244 1.568,21.239 ccw(c3.014,19.86) 1.016,19.86 1.016,18.87 ccw(c2.984,18.87) 1.591,17.48 ccw(c2.984,18.87) 1.595,17.476 1.841,17.229 2.11,16.96 2.382,16.689 cw(c1.693,16) 2.667,16 2.667,14.873 cw(c0.127,14.873) 1.923,13.077 1.406,12.56 ccw(c2.654,11.312) 0.889,11.312 0.889,9.944 ; OPT32.S2@4.166,28.31 ccw(c3.796,28.31) 4.058,28.572 ; OPT32.S2@4.404,28.452 cw(c4.404,28.998) 4.018,28.612 4.058,28.572 ; OPT32.S2@4.5,28.13 4.058,28.572 ; OPT42.S2@5.267,8.197 5.125,8.197 cw(c5.125,8.952) 4.592,8.418 ; OPT42.S2@5.381,8.264 4.964,8.264 cw(c4.964,8.791) 4.592,8.418 ; OPT42.S2@5.5,7.93 cw(c5.5,8.944) 4.783,8.227 4.592,8.418 ; -8.047,6.837 ccw(c-7.14,7.706) -7.254,6.455 cw(c-7.266,6.328) -7.25,6.454 ccw(c-7.07,7.972) -5.988,6.892 -5.802,7.078 -4.755,8.453 cw(c-4.654,8.376) -4.744,8.466 -4.602,8.608 cw(c-4.175,8.18) -4.175,8.785 -1.918,8.785 ; -7.165,27.499 ccw(c-6.263,27.773) -6.612,26.897 ; -6.612,26.897 ccw(c-6.2,28.13) -6.2,26.83 ; -6.612,26.897 ccw(c-6.263,27.773) -6.263,26.83 -6.2,26.83 ; -1.918,8.785 ccw(c-1.918,9.56) -1.143,9.56 ; -1.918,8.785 -1.879,8.785 ; -1.879,8.785 cw(c-1.879,8.049) -1.143,8.049 ; -1.879,8.785 -1.4,8.785 ; -1.4,8.785 cw(c-1.4,8.528) -1.143,8.528 ; -1.4,8.785 ccw(c-1.4,9.042) -1.143,9.042 ; -1.4,8.785 -1.143,8.785 ; -1.143,8.049 -1.143,8.528 ; -1.143,8.528 -1.143,8.785 ; -1.143,8.785 -1.143,9.042 ; -1.143,9.042 -1.143,9.56 ; 0.889,8.222 cw(c1.75,8.222) 1.75,9.083 ; 0.889,8.222 0.889,8.822 ; 0.889,8.822 cw(c1.15,8.822) 1.15,9.083 ; 0.889,8.822 0.889,9.06 ; 0.889,9.06 cw(c0.912,9.06) 0.912,9.083 1.15,9.083 ; 0.889,9.06 0.889,9.344 ; 0.889,9.344 ccw(c1.15,9.344) 1.15,9.083 ; 0.889,9.344 0.889,9.944 ; 0.889,9.944 ccw(c1.75,9.944) 1.75,9.083 ; 1.15,9.083 1.75,9.083 ; 1.75,9.083 3.259,9.083 cw(c3.259,7.469) 4.4,8.61 4.592,8.418